# EAGLE board MARC_DiffDrive_Base_v1.0 (EAGLE 9.7.0)
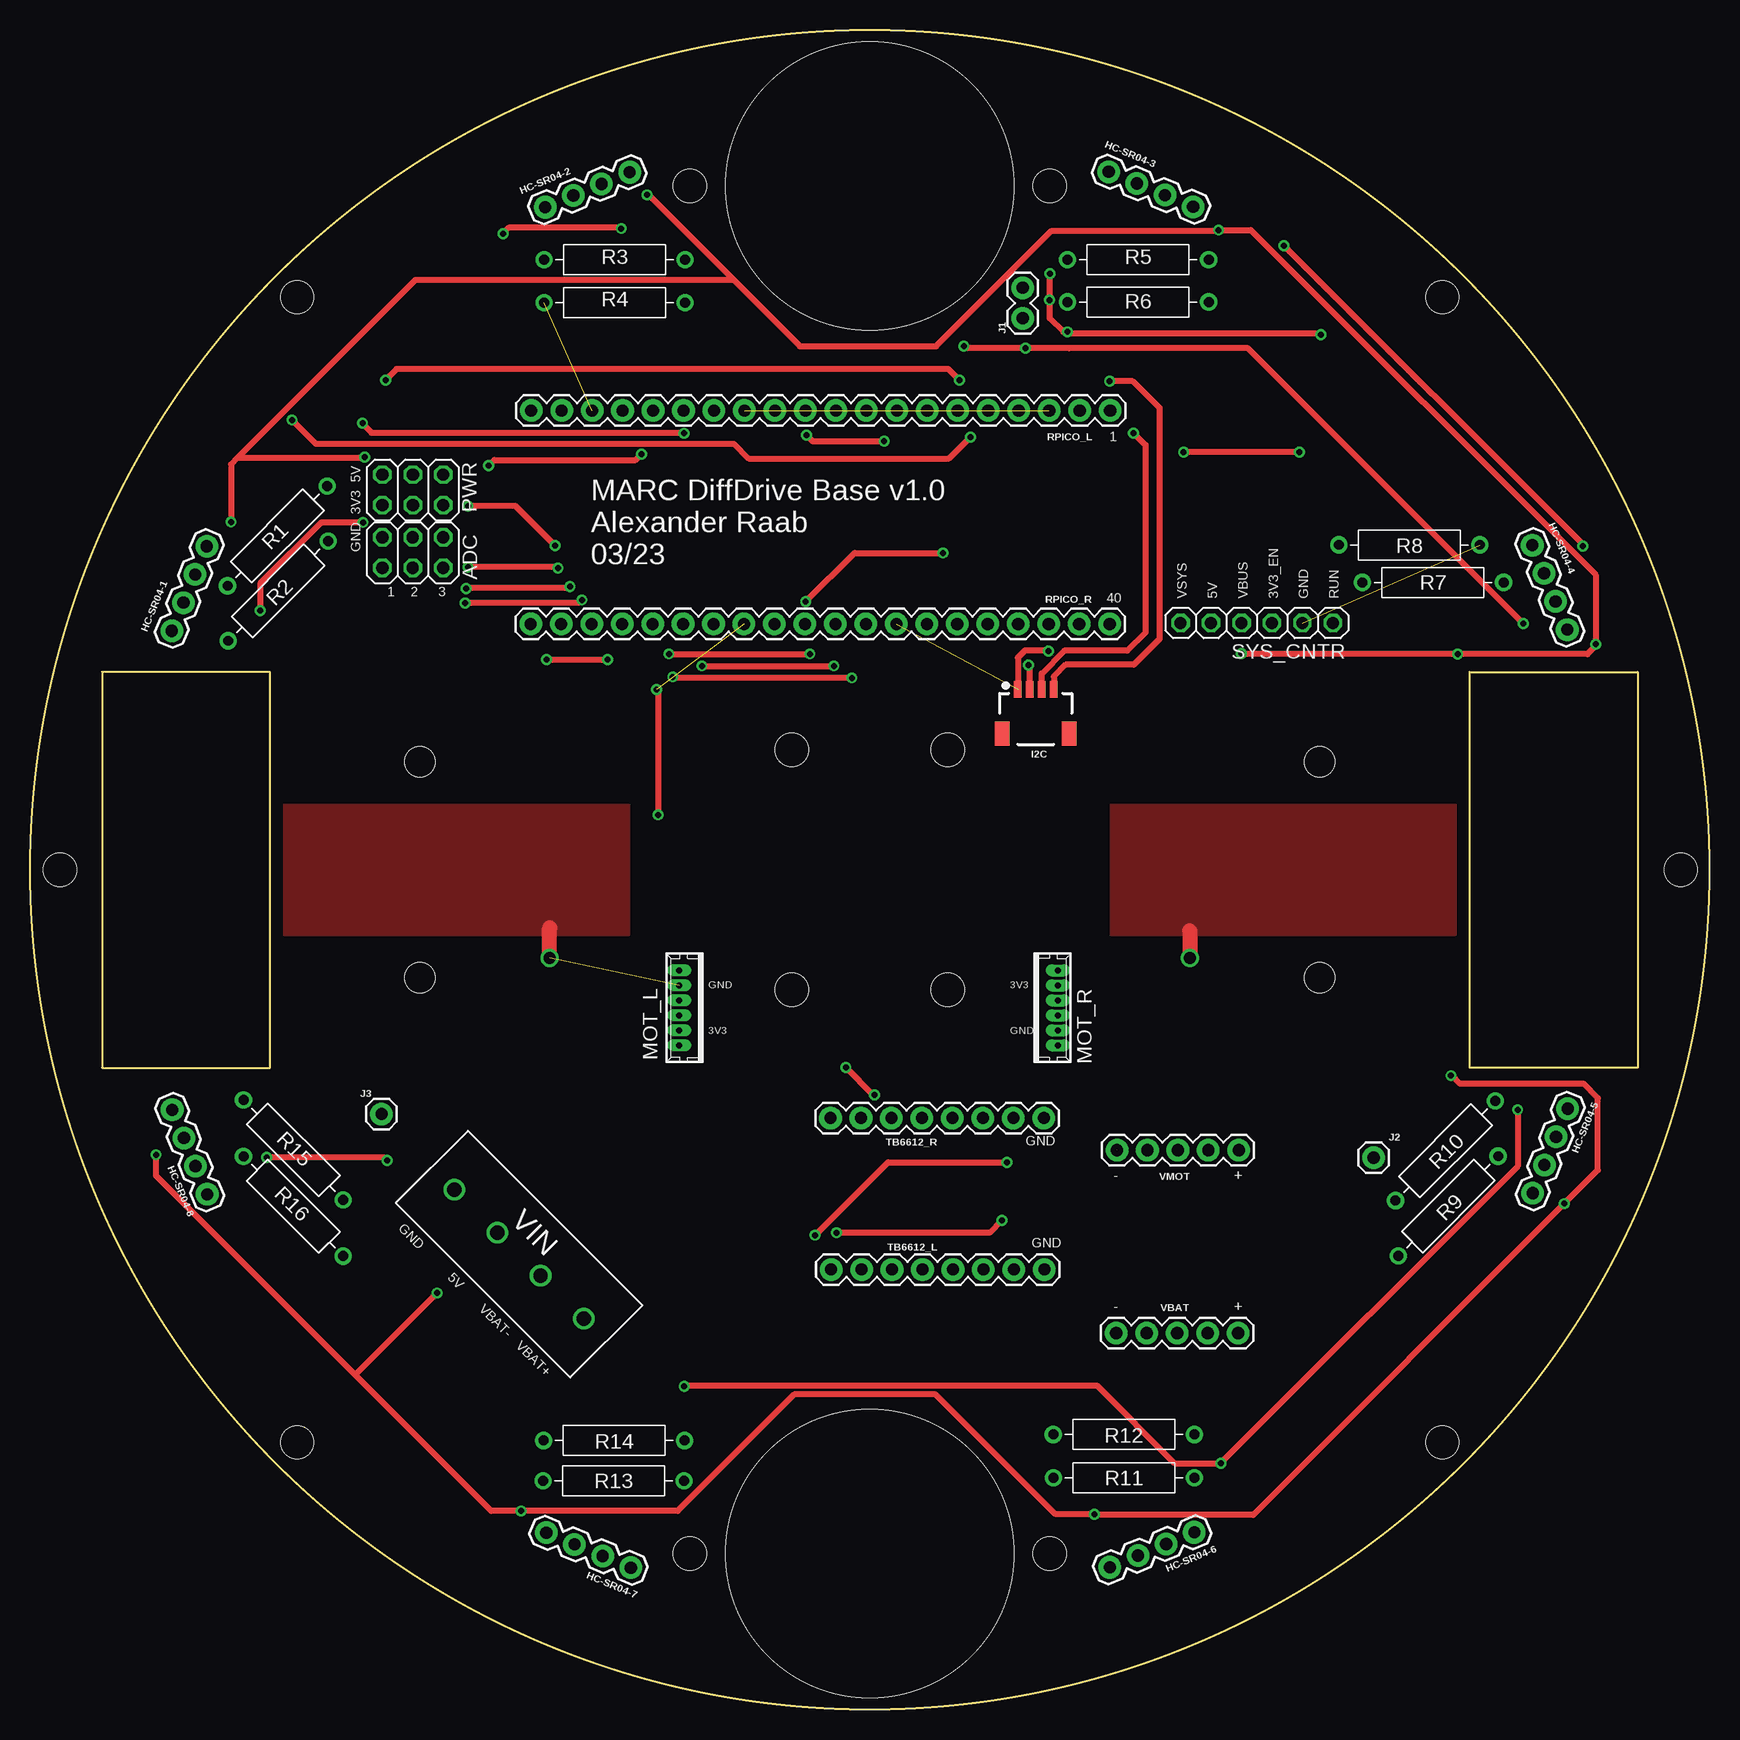
[diagram p0: board, top side]
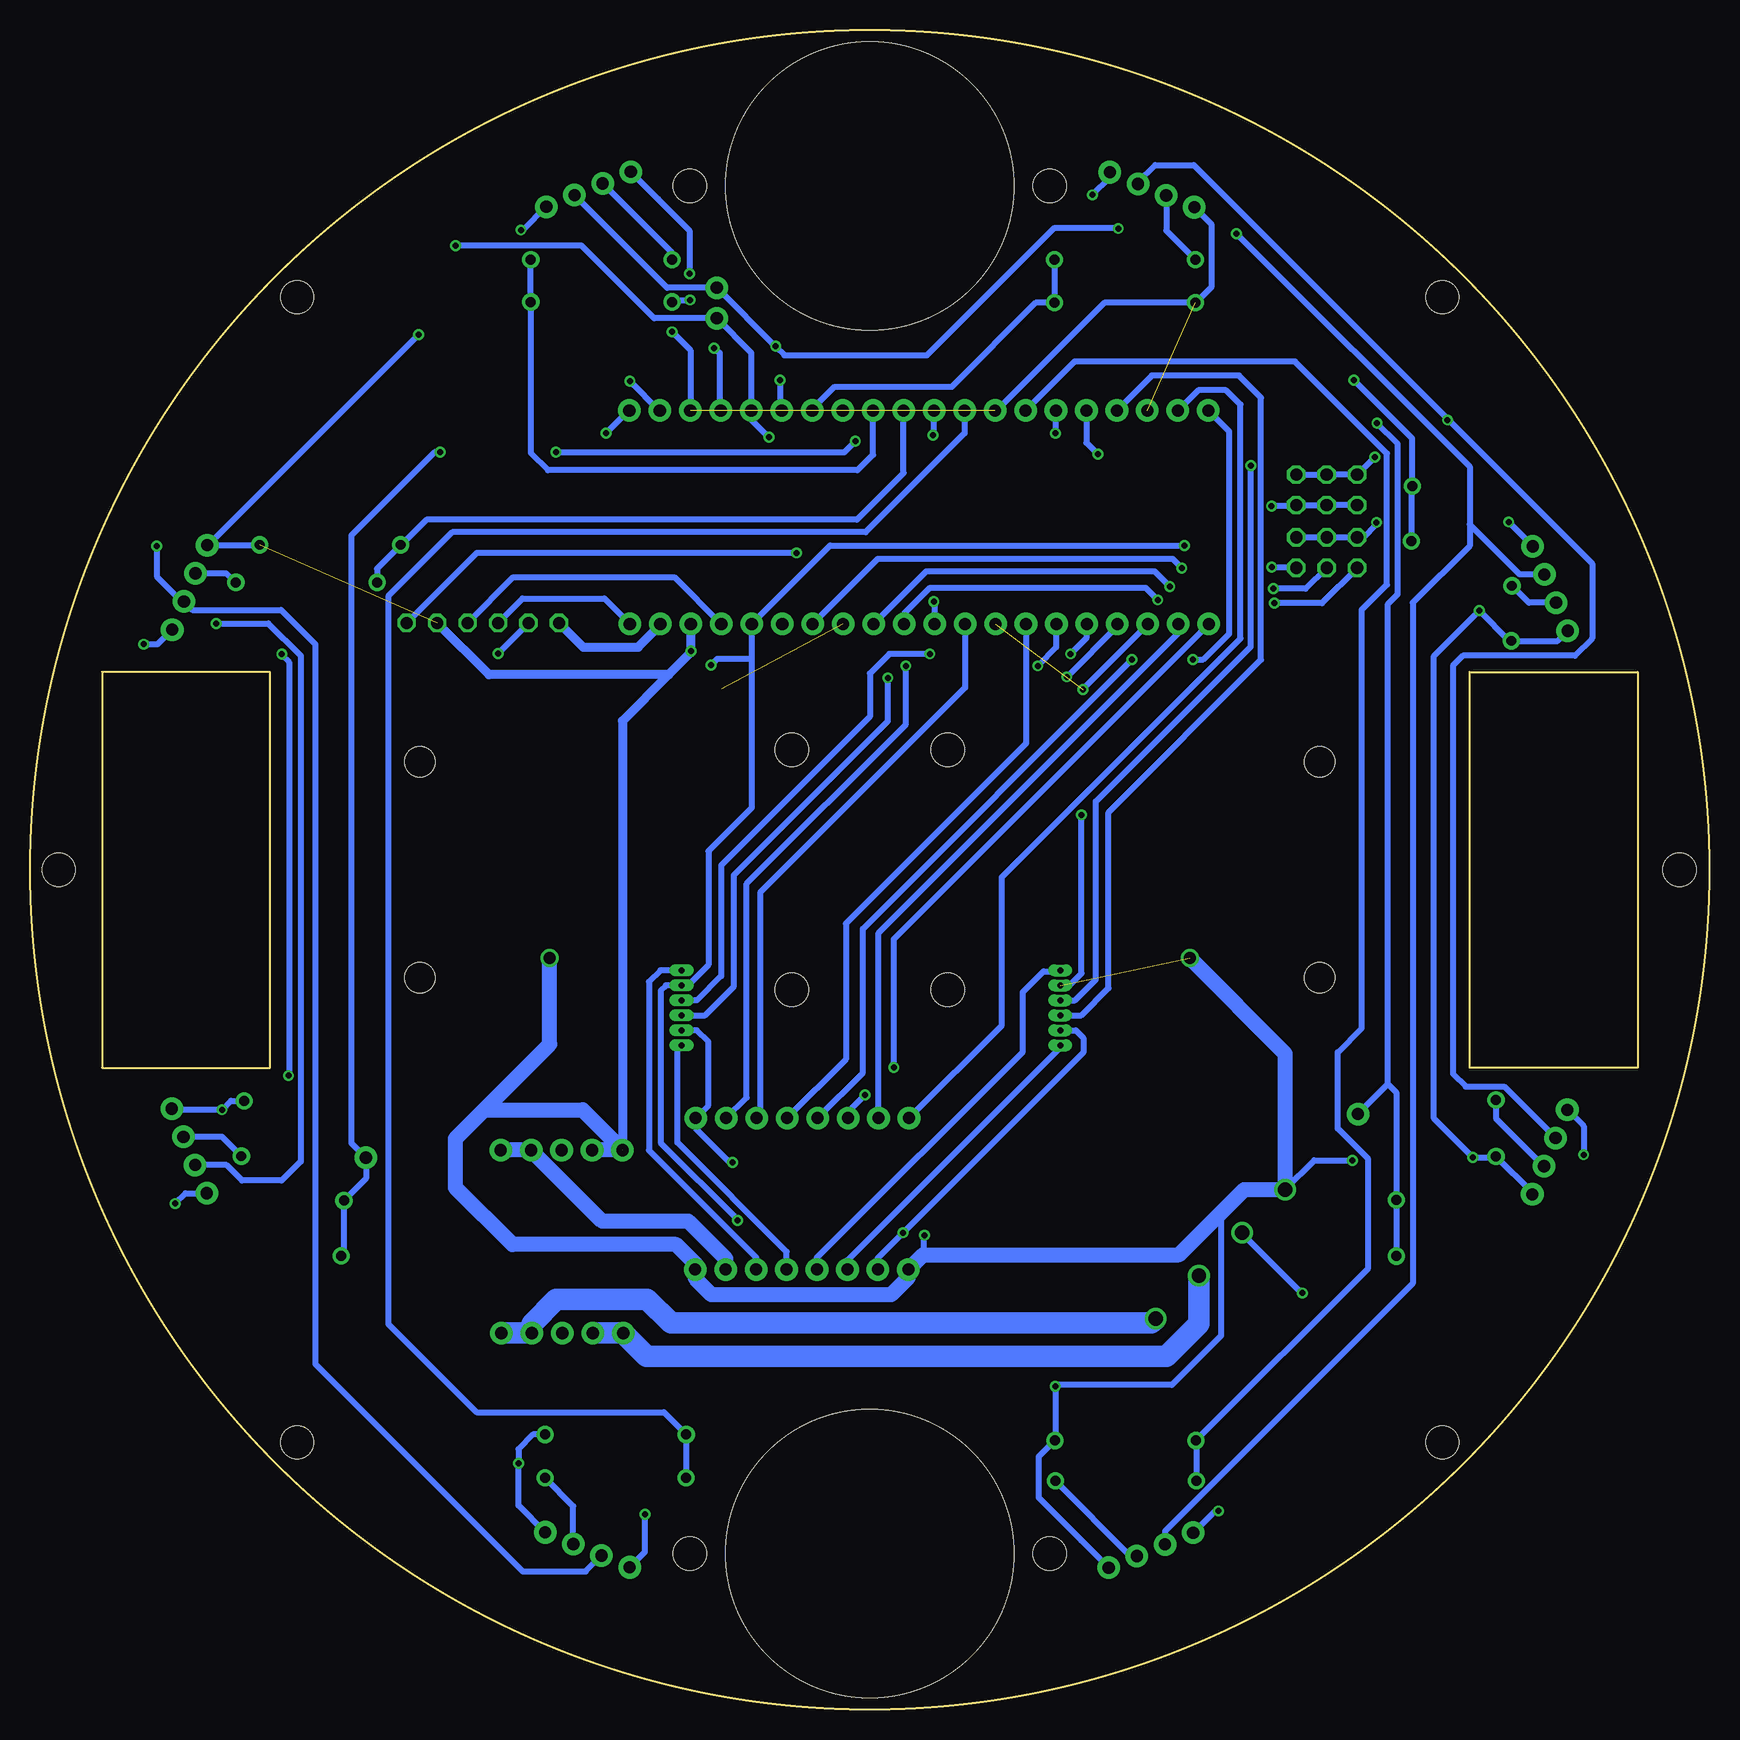
[diagram p1: board, bottom side, seen from below]

Size 140 x 140 mm. Coordinates in mm from the lower left corner, seen from the top.
Outline: 20,53.5 20,86.5 6,86.5 6,53.5 20,53.5
Outline: 120,86.5 134,86.5 134,53.5 120,53.5 120,86.5
Outline: circle at 70,70 radius 70
Copper layers (1*16): Top / Bottom
Stack-up Default Layer Stack: Top User Defined 0.035mm / Dielectric-1 User Defined 1.5mm / Bottom User Defined 0.035mm
Design rules "default": minimum track width 6mil, minimum drill 0.35mm, track to track 6mil, track to pad 6mil, pad to pad 6mil, via to via 6mil, smd to smd 6mil, copper to edge 40mil, drill to drill 6mil, minimum pad ring 10mil, minimum via ring 8mil, stop-mask expansion 4mil, vias tented up to drill 0mil, thermal gap 10mil
Holes 2.75 mm at 63.5,80 76.5,80 63.5,60 117.73,117.73 22.27,117.73 22.27,22.27 117.73,22.27 137.59,70 2.5,70 85,127 55,127 55,13 85,13 76.5,60
Holes 2.5 mm at 32.5,79 32.5,61 107.5,79 107.5,61
Holes 24 mm at 70,13 70,127
tKeepout: area 20,64.5 to 50,75.5; area 90,64.5 to 120,75.5; area 20,55 to 40,85; area 100,55 to 120,85; area 61,57.5 to 79,82.5
tRestrict: 8 lines

## Footprints (pad centres in the part's own frame; a part is rotated, then mirrored left to right if it is on the bottom)
2X03 = drill 1.016 octagon: 1 -2.54,-1.27; 2 -2.54,1.27; 3 0,-1.27; 4 0,1.27; 5 2.54,-1.27; 6 2.54,1.27
1X04 = drill 1.016 pad 1.88: 1 0,0; 2 2.54,0; 3 5.08,0; 4 7.62,0
1X04_1MM_RA = smd 0.6 x 1.35: 1 -1.5,0; 2 -0.5,0; 3 0.5,0; 4 1.5,0 | smd 1.2 x 2: NC1 2.8,-3.675; NC2 -2.8,-3.675
1X02 = drill 1.016 pad 1.88: 1 0,0; 2 2.54,0
1X01 = drill 1.016 pad 1.88: 1 0,0
53047-06 = drill 0.5 pad 0.698 long: 1 3.125,0.45; 2 1.875,0.45; 3 0.625,0.45; 4 -0.625,0.45; 5 -1.875,0.45; 6 -3.125,0.45
RESAD1176W63L850D250B = drill 0.83 pad 1.43: 1 -5.88,0; 2 5.88,0
1X20 = drill 1.016 pad 1.88: 1 0,0; 2 2.54,0; 3 5.08,0; 4 7.62,0; 5 10.16,0; 6 12.7,0; 7 15.24,0; 8 17.78,0; 9 20.32,0; 10 22.86,0; 11 25.4,0; 12 27.94,0; 13 30.48,0; 14 33.02,0; 15 35.56,0; 16 38.1,0; 17 40.64,0; 18 43.18,0; 19 45.72,0; 20 48.26,0
1X06 = drill 1.016 octagon: 1 -6.35,0; 2 -3.81,0; 3 -1.27,0; 4 1.27,0; 5 3.81,0; 6 6.35,0
1X08 = drill 1.016 pad 1.88: 1 0,0; 2 2.54,0; 3 5.08,0; 4 7.62,0; 5 10.16,0; 6 12.7,0; 7 15.24,0; 8 17.78,0
1X05 = drill 1.016 pad 1.88: 1 0,0; 2 2.54,0; 3 5.08,0; 4 7.62,0; 5 10.16,0
TERMBLK_508-4N = drill 1.2: 1 0,0; 2 5.08,0; 3 10.16,0; 4 15.24,0

## Placement (x,y rotation side)
ADC  PINHD-2X3  [2X03]  31.91,96.43 0 top
HC-SR04-1  [1X04]  11.82,89.92 67.5 top
HC-SR04-2  [1X04]  42.94,125.23 22.5 top
HC-SR04-3  [1X04]  89.92,128.18 337.5 top
HC-SR04-4  [1X04]  125.23,97.06 292.5 top
HC-SR04-5  [1X04]  128.18,50.08 247.5 top
HC-SR04-6  [1X04]  97.06,14.77 202.5 top
HC-SR04-7  [1X04]  50.08,11.82 157.5 top
HC-SR04-8  [1X04]  14.77,42.94 112.5 top
I2C  Qwiic Right Angle  [1X04_1MM_RA]  83.84,85.04 0 top
J1  [1X02]  82.75,115.97 90 top
J2  [1X01]  112,46 0 top
J3  [1X01]  29.3,49.64 0 top
MOT_L  53047-06  [53047-06]  54.57,58.49 90 top
MOT_R  53047-06  [53047-06]  85.24,58.5 270 top
PWR  PINHD-2X3  [2X03]  31.91,101.67 0 top
R1  1k  [RESAD1176W63L850D250B]  20.62,97.82 45 top
R2  1.5k  [RESAD1176W63L850D250B]  20.68,93.24 225 top
R3  1k  [RESAD1176W63L850D250B]  48.74,120.85 0 top
R4  1.5k  [RESAD1176W63L850D250B]  48.74,117.27 0 top
R5  1k  [RESAD1176W63L850D250B]  92.37,120.85 0 top
R6  1.5k  [RESAD1176W63L850D250B]  92.37,117.33 0 top
R7  1k  [RESAD1176W63L850D250B]  116.96,93.96 180 top
R8  1.5k  [RESAD1176W63L850D250B]  114.98,97.08 180 top
R9  1k  [RESAD1176W63L850D250B]  118.22,41.97 225 top
R10  1.5k  [RESAD1176W63L850D250B]  117.99,46.58 225 top
R11  1k  [RESAD1176W63L850D250B]  91.19,19.31 180 top
R12  1.5k  [RESAD1176W63L850D250B]  91.17,22.92 180 top
R13  1k  [RESAD1176W63L850D250B]  48.65,19.06 180 top
R14  1.5k  [RESAD1176W63L850D250B]  48.69,22.42 180 top
R15  1k  [RESAD1176W63L850D250B]  21.95,46.65 315 top
R16  1.5k  [RESAD1176W63L850D250B]  21.95,41.95 315 top
RPICO_L  1  [1X20]  90.04,108.28 180 top
RPICO_R  40  [1X20]  90,90.49 180 top
SYS_CNTR  [1X06]  102.26,90.57 0 top
TB6612_L  GND  [1X08]  84.56,36.68 180 top
TB6612_R  GND  [1X08]  84.51,49.3 180 top
VBAT  [1X05]  100.7,31.38 180 top
VIN  2828XX-4282837-4  [TERMBLK_508-4N]  35.38,43.35 315 top
VMOT  [1X05]  100.77,46.63 180 top

## Library data of the parts
ADC PWR = Connector; CATEGORY: CONNECTOR; SUB-CATEGORY: PIN-HEADER
HC-SR04-1-HC-SR04-8 = SparkFun-Connectors; PROD_ID: CONN-09696
I2C = SparkFun-Connectors; PROD_ID: CONN-13729
J1-J3 RPICO_L RPICO_R VBAT VMOT = SparkFun-Connectors
MOT_L MOT_R = con-molex; MF: MOLEX; MPN: 53047-0610-C; OC_FARNELL: 9733078; OC_NEWARK: 03M2965
R1-R16 = Resistor; CATEGORY: Resistor; SUB-CATEGORY: Fixed
SYS_CNTR = adafruit
TB6612_L TB6612_R = SparkFun-Connectors; PROD_ID: CONN-08438
VIN = Connector; CATEGORY: Connector; DESCRIPTION: TERM BLK 4P SIDE ENT 5.08mm PCB; MANUFACTURER: TE Connectivity; MPN: 282837-4; OPERATING_TEMPERATURE: 40°C to +105°C; PART_STATUS: Active; ROHS_COMPLIANCE: RoHS Compliant; SERIES: 283737; SUBCATEGORY: Terminal Block; TYPE: Side Wire Entry

## Nets
3V3: I2C.2 MOT_L.5 MOT_R.5 PWR.1 PWR.3 PWR.5 RPICO_R.5 TB6612_L.7
3V3_EN: RPICO_R.4 SYS_CNTR.4
5V: HC-SR04-1.4 HC-SR04-2.4 HC-SR04-3.4 HC-SR04-4.4 HC-SR04-5.4 HC-SR04-6.4 HC-SR04-7.4 HC-SR04-8.4 PWR.2 PWR.4 PWR.6 SYS_CNTR.2 VIN.2
AIN1: RPICO_R.20 TB6612_R.6
AIN2: RPICO_R.19 TB6612_R.7
AO1: MOT_L.6 TB6612_L.6
AO2: MOT_L.1 TB6612_L.5
BIN1: RPICO_R.14 TB6612_R.4
BIN2: RPICO_R.12 TB6612_R.3
BO1: MOT_R.6 TB6612_L.3
BO2: MOT_R.1 TB6612_L.4
C1L: MOT_L.3 RPICO_L.16
C1R: MOT_R.3 RPICO_R.17
C2L: MOT_L.4 RPICO_L.17
C2R: MOT_R.4 RPICO_R.16
GND: ADC.2 ADC.4 ADC.6 HC-SR04-1.1 HC-SR04-2.1 HC-SR04-3.1 HC-SR04-4.1 HC-SR04-5.1 HC-SR04-6.1 HC-SR04-7.1 HC-SR04-8.1 I2C.1 MOT_L.2 MOT_R.2 R2.2 R4.1 R6.1 R8.1 R10.1 R12.1 R14.1 R16.1 RPICO_L.3 RPICO_L.8 RPICO_L.13 RPICO_L.18 RPICO_R.3 RPICO_R.8 RPICO_R.13 RPICO_R.18 SYS_CNTR.5 TB6612_L.1 TB6612_L.8 TB6612_R.1 VIN.1 VMOT.4 VMOT.5
HC_TRIG1: HC-SR04-1.3 HC-SR04-3.3 HC-SR04-5.3 HC-SR04-7.3 J1.2 RPICO_L.4
HC_TRIG2: HC-SR04-2.3 HC-SR04-4.3 HC-SR04-6.3 HC-SR04-8.3 J1.1 RPICO_L.5
N$2: HC-SR04-8.2 R15.1
N$3: HC-SR04-7.2 R13.1
N$4: R11.2 R12.2 RPICO_L.12
N$5: ADC.1 RPICO_R.10
N$7: HC-SR04-6.2 R11.1
N$8: J2.1 R9.2 R10.2 RPICO_L.11
N$9: HC-SR04-5.2 R9.1
N$10: HC-SR04-4.2 R7.1
N$11: R7.2 R8.2 RPICO_L.10
N$12: R5.2 R6.2 RPICO_L.9
N$13: HC-SR04-3.2 R5.1
N$14: R3.2 R4.2 RPICO_L.7
N$15: HC-SR04-2.2 R3.1
N$16: HC-SR04-1.2 R1.1
N$17: R1.2 R2.1 RPICO_L.6
N$18: J3.1 R15.2 R16.2 RPICO_L.15
N$21: R13.2 R14.2 RPICO_L.14
N$22: ADC.3 RPICO_R.9
N$25: ADC.5 RPICO_R.7
NSTBY: RPICO_L.20 TB6612_R.5
PWMA: RPICO_L.19 TB6612_R.8
PWMB: RPICO_R.15 TB6612_R.2
RUN: RPICO_R.11 SYS_CNTR.6
SCL1: I2C.4 RPICO_L.2
SDA1: I2C.3 RPICO_L.1
VBAT+: VBAT.1 VBAT.2 VIN.4
VBAT-: VBAT.4 VBAT.5 VIN.3
VBUS: RPICO_R.1 SYS_CNTR.3
VMOT: TB6612_L.2 VMOT.1 VMOT.2
VSYS: RPICO_R.2 SYS_CNTR.1

## Tracks (layer width: path | path; a pad name or v marks a point on that pad's centre or on a via)
3V3  (via drill 0.5)
  Top 0.508: v43.76,97.02 40.46,100.33 v36.5,100.33 | v81.03,40.78 80,39.75 v67.24,39.75 | v83.23,87.07 83.34,86.97 I2C.2
  Bottom 0.508: RPICO_R.5 79.84,87.58 82.72,87.58 v83.23,87.07 | RPICO_R.5 79.84,75.16 83.45,71.55 83.45,62.07 85.15,60.38 MOT_R.5 86.98,60.38 87.42,59.94 87.42,47.23 81,40.81 v81.03,40.78 | v43.76,97.02 73.3,97.02 RPICO_R.5 | v36.5,100.33 34.52,100.33 PWR.5 PWR.3 PWR.1 | v67.24,39.75 67.23,39.73 | 67.23,39.73 69.32,37.65 TB6612_L.7 | MOT_L.5 52.82,56.62 52.2,56 52.2,54.76 67.23,39.73
3V3_EN
  Bottom 0.508: SYS_CNTR.4 99.72,94.38 86.28,94.38 RPICO_R.4
5V  (via drill 0.5)
  Top 0.508: v16.75,99 16.75,103.78 17.32,104.35 | 27.12,27.88 38.45,16.55 v40.94,16.55 | v40.94,16.55 | v40.94,16.55 53.98,16.55 63.7,26.27 75.5,26.27 85.49,16.27 v88.74,16.27 88.78,16.23 101.97,16.23 v127.91,42.17 130.71,44.97 130.71,50.95 129.5,52.15 119.19,52.15 118.51,52.84 v118.45,52.84 | 51.43,126.31 v51.43,126.25 51.57,126.25 58.65,119.17 | 27.12,27.88 10.5,44.5 v10.5,46.25 | 17.32,104.35 32.14,119.17 58.65,119.17 | v33.95,34.71 27.12,27.88 | v100.99,88.03 100.99,87.99 v119,87.99 119.02,87.97 129.82,87.97 130.51,88.67 v130.51,88.79 130.51,94.58 101.77,123.33 v99.08,123.33 99.02,123.27 85.16,123.27 75.53,113.64 64.18,113.64 58.65,119.17 | 17.32,104.35 27.83,104.35 v27.88,104.4
  Bottom 0.508: HC-SR04-8.4 10.5,48.63 v10.5,46.25 | v40.94,16.55 41.2,16.55 43.01,14.73 HC-SR04-7.4 | v16.75,99 16.75,98.94 16.73,98.96 HC-SR04-1.4 | HC-SR04-3.4 98.9,123.33 v99.08,123.33 | v130.51,88.79 129.37,88.79 HC-SR04-4.4 | HC-SR04-5.4 127.04,43.04 v127.91,42.17 | v51.43,126.25 49.98,127.7 HC-SR04-2.4 | HC-SR04-6.4 88.74,13.13 v88.74,16.27 | PWR.6 PWR.4 PWR.2 27.9,104.4 v27.88,104.4 | VIN.2 38.97,39.68 34.01,34.71 v33.95,34.71 | SYS_CNTR.2 v100.99,88.03 | v119,87.99 119,87.91 118.4,87.31 118.4,52.89 v118.45,52.84
AIN1  (via drill 0.5)
  Top 0.508: v70.38,51.24 70.29,51.24 v68,53.52
  Bottom 0.508: RPICO_R.20 68,64.22 v68,53.52 | TB6612_R.6 71.81,49.81 v70.38,51.23 v70.38,51.24
AIN2
  Bottom 0.508: RPICO_R.19 44.28,89.72 69.27,64.73 TB6612_R.7
AO1
  Bottom 0.508: TB6612_L.6 71.86,37.44 54.12,55.18 MOT_L.6
AO2
  Bottom 0.508: TB6612_L.5 74.4,37.68 57.25,54.83 57.25,59.8 55.51,61.53 54.21,61.53 MOT_L.1
BIN1
  Bottom 0.508: RPICO_R.14 56.98,80.53 72,65.51 72,54.19 TB6612_R.4
BIN2
  Bottom 0.508: RPICO_R.12 62.06,85.18 79.14,68.1 79.14,49.59 TB6612_R.3
BO1
  Bottom 0.508: MOT_R.6 87.45,61.62 88.41,60.67 88.41,46.61 79.48,37.68 TB6612_L.3
BO2
  Bottom 0.508: MOT_R.1 86.03,55.03 86.03,47.25 76.94,38.15 TB6612_L.4
C1L  (via drill 0.5)
  Top 0.508: v50.99,104.66 50.48,104.15 38.72,104.15 v38.24,103.67
  Bottom 0.508: MOT_L.3 52.88,59.12 51.15,60.85 51.15,75.69 38.24,88.6 v38.24,103.67 | RPICO_L.16 51.94,105.6 v50.99,104.66
C1R  (via drill 0.5)
  Top 0.508: v68.5,86 53.66,86 v53.58,86.08
  Bottom 0.508: RPICO_R.17 49.36,90.31 v53.58,86.08 | MOT_R.3 83.72,57.88 81.32,60.28 81.32,69.56 68.5,82.38 v68.5,86
C2L
  Bottom 0.508: MOT_L.4 52.37,57.87 50.1,60.14 50.1,74.78 37.38,87.5 37.38,109.35 39.22,111.19 46.49,111.19 RPICO_L.17
C2R  (via drill 0.5)
  Top 0.508: v53.25,88 v65,88
  Bottom 0.508: MOT_R.4 84.4,59.12 82.39,61.14 82.39,70.37 70,82.76 70,86.36 68.36,88 v65,88 | v53.25,88 51.9,89.36 RPICO_R.16
GND  (via drill 0.5, 1)  (8 unrouted)
  Top 0.508: v52.24,85.02 52.34,84.91 v52.34,74.58 | v29.76,45.78 29.51,46.03 v19.73,46.03 | v81.43,45.62 71.52,45.62 v65.45,39.54 | I2C.1 82.34,87.67 82.95,88.29 84.85,88.29 v84.91,88.23 | v107.6,114.61 107.48,114.73 86.59,114.73 v86.49,114.83 86.13,114.83 84.99,115.97 v84.99,117.5 84.99,119.64 v85.03,119.68 | v124,50 124,45.27 99.29,20.56 v99.29,20.52 95.42,20.52 88.92,27.02 54.61,27.02 v54.54,26.94 | v19.2,91.59 19.2,93.88 24.28,98.96 v27.75,98.96
  Top 1.27: 96.67,64.92 v96.67,62.63 | v43.33,62.63 43.33,65.17
  Bottom 0.508: 52.16,115.56 50.45,117.27 R4.1 42.83,117.27 41.48,118.61 41.48,123.77 HC-SR04-2.1 | v52.24,85.02 52.24,85.07 RPICO_R.18 | MOT_R.2 84.4,56.62 83.45,55.68 83.45,50.36 TB6612_R.1 84.51,48.44 81.68,45.62 v81.43,45.62 | MOT_L.2 53.34,60.37 52.34,61.36 v52.34,74.58 | HC-SR04-5.1 128.1,50 v124,50 123.26,50.74 R10.1 | HC-SR04-6.1 99.29,17 v99.29,20.52 | v29.76,45.78 32.95,45.78 VIN.1 | v86.49,114.83 84.96,113.3 RPICO_L.3 | RPICO_L.13 59.44,108.28 52.16,115.56 | 52.16,115.56 | v107.6,114.61 125.11,97.11 125.11,97.01 HC-SR04-4.1 125.2,97.08 R8.1 | ADC.6 ADC.4 ADC.2 28.86,97.7 27.75,98.81 v27.75,98.96 | 40.72,41.41 40.72,31.15 44.82,27.05 54.54,27.05 v54.54,26.94 54.54,22.45 R14.1 55.91,21.09 55.91,17.65 52.36,14.1 52.36,14.09 HC-SR04-7.1 | 84.92,88.24 v84.91,88.23 | v84.99,117.5 86.32,117.5 R6.1 | v99.29,20.52 99.29,20.57 | R12.1 98.07,22.92 99.29,21.71 v99.29,20.52 | HC-SR04-8.1 14.77,43.09 R16.1 17.88,46.03 v19.73,46.03 22.97,49.27 22.97,87.83 v19.2,91.59 16.69,89.08 R2.2 12.65,89.08 HC-SR04-1.1 | 65.46,37.9 65.46,39.52 v65.45,39.54 | HC-SR04-3.1 87.64,125.91 87.64,125.9 85.03,123.29 v85.03,119.68
  Bottom 0.762: RPICO_R.3 84.92,88.24 84.92,88.1 86.76,86.26 | 86.76,86.26 101.75,86.26 SYS_CNTR.5 | VMOT.5 90.61,82.41 86.76,86.26
  Bottom 1.27: 102.14,49.98 93.92,49.98 90.61,46.66 VMOT.5 | v43.33,62.63 35.38,54.68 VIN.1 38.78,43.35 40.72,41.41 44.23,37.9 65.46,37.9 65.55,37.9 TB6612_L.8 66.78,36.02 68.19,34.6 83.22,34.6 84.56,35.94 TB6612_L.1 84.56,37.19 86.13,38.76 99.79,38.76 104.53,43.5 104.53,47.6 102.14,49.98 | 102.14,49.98 96.67,55.46 v96.67,62.63 | 90.62,46.63 VMOT.4
  pour Top: 50,75.5 20,75.5 20,64.5 50,64.5
  pour Top: 90,75.5 120,75.5 120,64.5 90,64.5
HC_TRIG1  (via drill 0.5)
  Top 0.508: v77.83,113.65 77.99,113.49 v82.98,113.49 86.62,113.49 86.64,113.47 101.53,113.47 v124.48,90.52 | v49.29,123.45 49.24,123.51 39.9,123.51 v39.42,123.04
  Bottom 0.508: 77.86,113.62 J1.2 86.88,118.51 HC-SR04-3.3 | 20,98.79 20,97 24.74,92.26 24.74,35.51 45.39,14.86 HC-SR04-7.3 | v77.83,113.65 77.86,113.62 | v82.98,113.49 82.94,113.49 82.52,113.07 82.52,108.38 RPICO_L.4 | 20,98.79 20,103.61 v39.42,123.04 | 77.86,113.62 77.12,112.88 65.23,112.88 54.6,123.51 49.29,123.51 v49.29,123.45 | v124.48,90.52 124.46,90.54 120.13,90.54 117.44,87.84 117.44,45.68 119.02,44.09 122.32,44.09 123.62,45.39 HC-SR04-5.3 | HC-SR04-1.3 15.82,94.61 20,98.79
HC_TRIG2  (via drill 0.5)
  Top 0.508: v129.44,96.97 129.44,97.13 v104.53,122.04 | v21.83,107.5 23.81,105.52 58.67,105.52 59.9,104.29 76.6,104.29 v78.38,106.07
  Bottom 0.508: v129.44,96.97 129.44,94.45 127.34,92.36 HC-SR04-4.3 126.46,91.65 119.08,91.65 116.22,88.79 116.22,28.8 98.93,11.51 93.68,11.51 HC-SR04-6.3 | HC-SR04-2.3 47.64,127.31 46.2,128.75 42.99,128.75 21.83,107.6 v21.83,107.5 21.74,107.5 9.78,95.54 9.78,89.29 11.22,87.85 20.56,87.85 21.39,87.01 21.39,52.99 20.33,51.92 17.12,51.92 HC-SR04-8.3 | v104.53,122.04 v104.52,122.04 94.04,122.04 87.97,115.97 J1.1 79.88,113.1 RPICO_L.5 79.88,107.52 78.43,106.07 v78.38,106.07
N$2
  Bottom 0.508: R15.1 17.8,49.29 HC-SR04-8.2
N$3
  Bottom 0.508: R13.1 48.26,12.79 HC-SR04-7.2
N$4
  Bottom 0.508: R11.2 85.29,19.33 R12.2 87.15,24.78 102.78,24.78 110.15,32.15 110.15,92.79 104.81,98.13 70.35,98.13 62.1,106.38 RPICO_L.12
N$5  (via drill 0.5)
  Top 0.508: v46,92.5 45.75,92.25 36.29,92.25 v36.27,92.22
  Bottom 0.508: v46,92.5 47.02,93.52 64.97,93.52 67.14,91.35 RPICO_R.10 | v36.27,92.22 32.31,92.22 ADC.1
N$7
  Bottom 0.508: HC-SR04-6.2 94.71,16.94 R11.1
N$8  (via drill 0.5)
  Top 0.508: v105.81,104.8 v96.16,104.8 | v71.21,105.71 65.24,105.71 v64.74,106.22
  Bottom 0.508: 96.06,104.7 v96.16,104.8 72.12,104.8 v71.21,105.71 | v105.81,104.8 106.27,104.8 113.21,97.86 113.21,47.21 J2.1 112,44.25 R10.2 113.83,38.04 R9.2 | v64.74,106.22 64.64,106.32 RPICO_L.11
N$9
  Bottom 0.508: R9.1 123.99,47.73 HC-SR04-5.2
N$10
  Bottom 0.508: HC-SR04-4.2 123.66,94.71 122.88,93.93 R7.1
N$11
  Bottom 0.508: R7.2 111.08,95.1 R8.2 109.05,97.08 106.95,99.18 71.08,99.18 67.18,103.08 RPICO_L.10
N$12
  Bottom 0.508: R5.2 R6.2 98.26,117.32 98.26,104.73 96.83,103.3 71.03,103.3 69.72,104.6 RPICO_L.9
N$13
  Bottom 0.508: HC-SR04-3.2 86.49,121.44 R5.1
N$14
  Bottom 0.508: R3.2 R4.2 56.17,117.27 63.16,110.27 72.93,110.27 74.8,108.4 RPICO_L.7
N$15
  Bottom 0.508: HC-SR04-2.2 45.29,123.29 R3.1
N$16
  Bottom 0.508: HC-SR04-1.2 15.06,92.27 R1.1
N$17  (via drill 0.5)
  Top 0.508: v77.47,110.81 76.55,111.73 30.55,111.73 v29.64,110.82
  Bottom 0.508: v29.64,110.82 24.78,105.95 R1.2 24.84,101.92 R2.1 | v77.47,110.81 77.47,108.41 RPICO_L.6
N$18  (via drill 0.5)
  Top 0.508: v27.71,107.24 27.71,107.19 28.47,106.42 54.46,106.42 v54.51,106.38
  Bottom 0.508: J3.1 26.8,52.14 | 26.8,52.14 26.11,51.45 R15.2 R16.2 | 26.8,52.14 26.8,92.16 25.98,92.98 25.98,105.51 v27.71,107.24 | RPICO_L.15 54.51,108.25 v54.51,106.38
N$21
  Bottom 0.508: R13.2 42.77,22.38 R14.2 28.46,36.78 28.46,45.89 31,48.43 31,54.78 28.98,56.79 28.98,91.67 26.89,93.76 26.89,104.7 34.55,112.36 52.94,112.36 RPICO_L.14
N$22  (via drill 0.5)
  Top 0.508: v45,93.61 44.89,93.5 36.44,93.5 v36.36,93.42
  Bottom 0.508: v45,93.61 46.27,94.88 65.29,94.88 RPICO_R.9 | v36.36,93.42 33.65,93.42 ADC.3
N$25  (via drill 0.5)
  Top 0.508: v44,95.16 43.93,95.22 v36.5,95.22
  Bottom 0.508: RPICO_R.7 69.33,95.92 44.76,95.92 v44,95.16 | v36.5,95.22 34.51,95.22 ADC.5
NSTBY  (via drill 0.5)
  Top 0.508: v43.08,87.53 v48.16,87.53
  Bottom 0.508: TB6612_R.5 70.58,53.08 70.58,65.08 48.27,87.38 | 48.27,87.38 48.19,87.46 | v48.16,87.53 48.27,87.41 48.27,87.38 | v43.08,87.53 42.2,87.53 40.06,89.67 40.06,106.56 RPICO_L.20
PWMA
  Bottom 0.508: TB6612_R.8 59,57.03 59,69.39 39.1,89.29 39.1,108.78 40.3,109.97 42.62,109.97 RPICO_L.19
PWMB  (via drill 0.5)
  Top 0.508: v56,87 v67,87
  Bottom 0.508: TB6612_R.2 80.27,51 80.27,68.84 67,82.11 v67,87 | v56,87 54.44,88.56 RPICO_R.15
RUN  (via drill 0.5)
  Top 0.508: v64.67,92.35 68.73,96.42 v76.1,96.42
  Bottom 0.508: SYS_CNTR.6 102.77,96.42 v76.1,96.42 | v64.67,92.35 64.6,92.28 RPICO_R.11
SCL1  (via drill 0.5)
  Top 0.508: v90,110.71 91.93,110.71 94.17,108.48 94.17,89.25 92,87.09 86.33,87.09 85.34,86.1 I2C.4
  Bottom 0.508: v90,110.71 87.56,108.28 RPICO_L.2
SDA1  (via drill 0.5)
  Top 0.508: v91.99,106.4 92.98,105.4 92.98,89.78 91.46,88.26 86.23,88.26 84.34,86.37 I2C.3
  Bottom 0.508: v91.99,106.4 90.04,108.35 RPICO_L.1
VBAT+
  Bottom 1.778: VIN.4 46.51,32.22 86.57,32.22 88.54,34.19 96.13,34.19 98.16,32.15 VBAT.2 VBAT.1
VBAT-
  Bottom 1.778: VIN.3 42.56,32.16 45.27,29.45 88.62,29.45 VBAT.5 VBAT.4
VBUS
  Bottom 0.508: RPICO_R.1 92.12,92.61 98.96,92.61 SYS_CNTR.3
VMOT
  Bottom 1.27: TB6612_L.2 82.02,37.6 85.11,40.69 92.3,40.69 VMOT.2 VMOT.1
VSYS
  Bottom 0.762: SYS_CNTR.1 93.88,88.54 89.3,88.54 87.46,90.39 RPICO_R.2

## Text on the board
tPlace: 1 | GND 3V3 5V | MARC DiffDrive Base v1.0 / Alexander Raab / 03/23 | 1 2 3 | VSYS / / 5V / / VBUS / / 3V3_EN / / GND / / RUN | 40 | GND | 3V3 | 3V3 | GND | GND | - + | GND 5V VBAT- VBAT+ | GND | - +